# Altium PCB PCB2.PcbDoc (part 1 of 2)
Units mm, origin at the board's own origin, x right, y up, seen from the top; angles counter-clockwise.
Board outline 97.92 x 101.35 mm, 2 copper layers (Top Layer, Bottom Layer); 189 components, 25 nets, 488 pads, 0 vias.
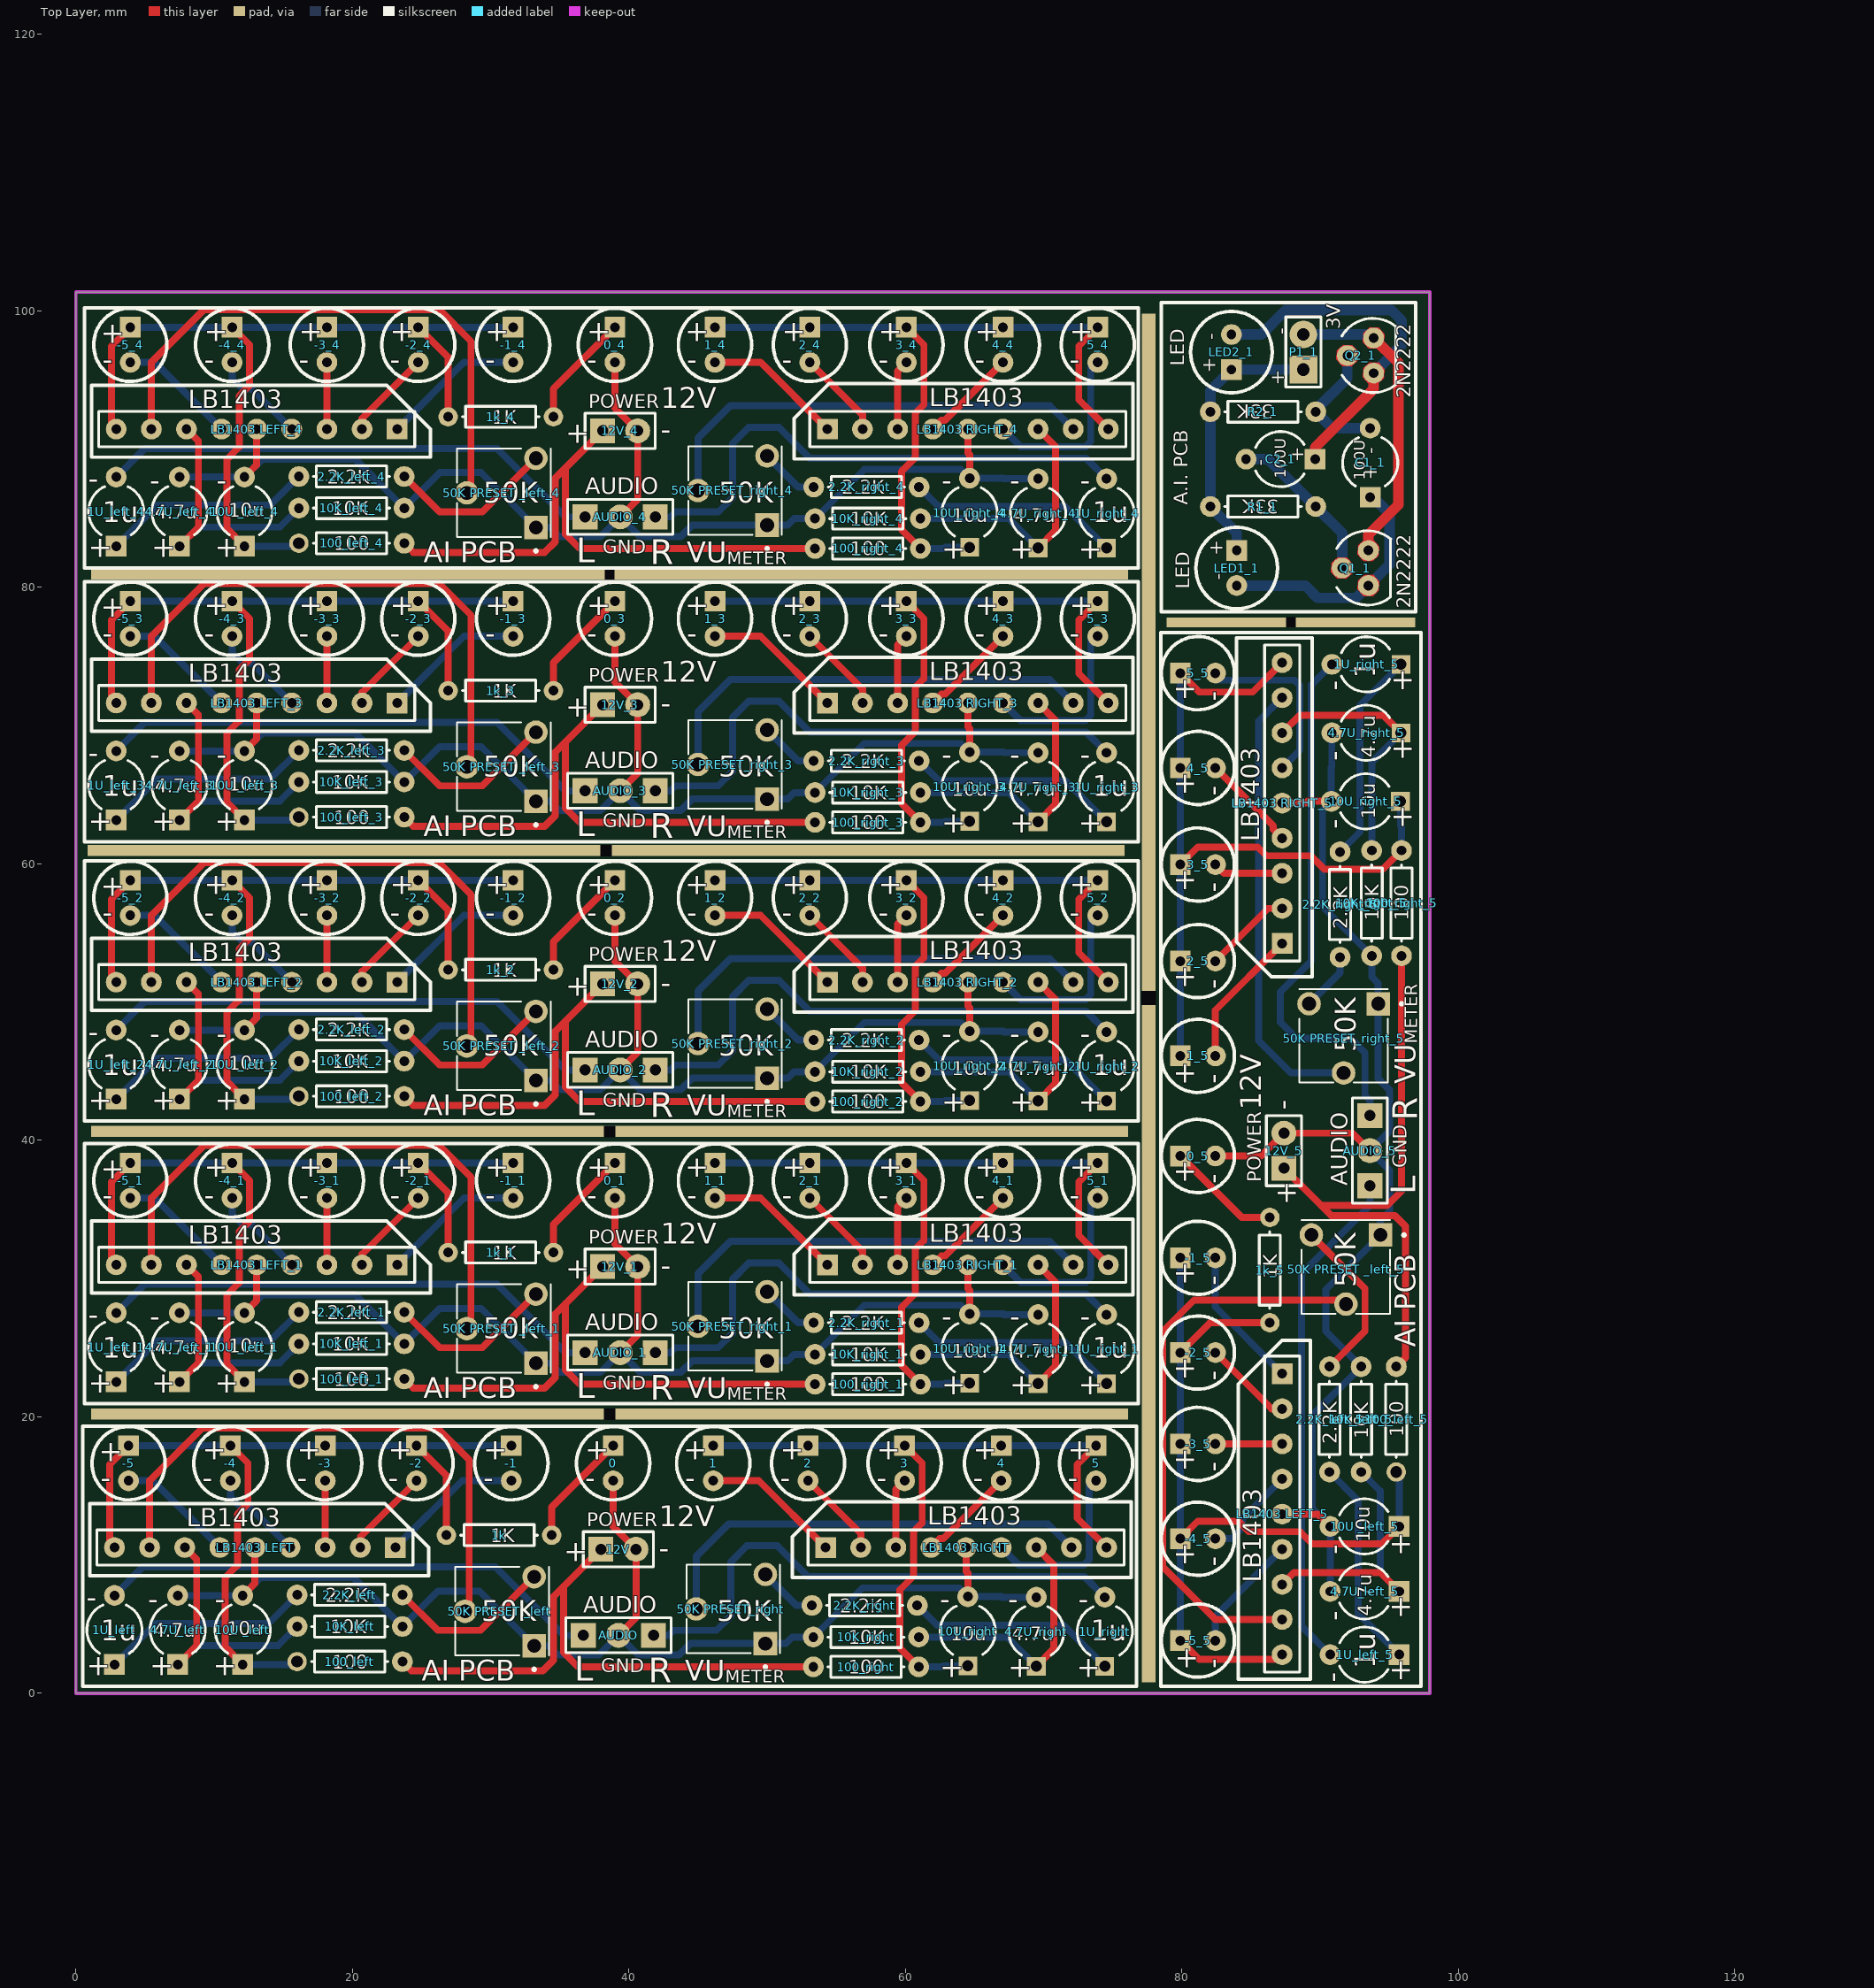
[diagram p0: Top Layer view]
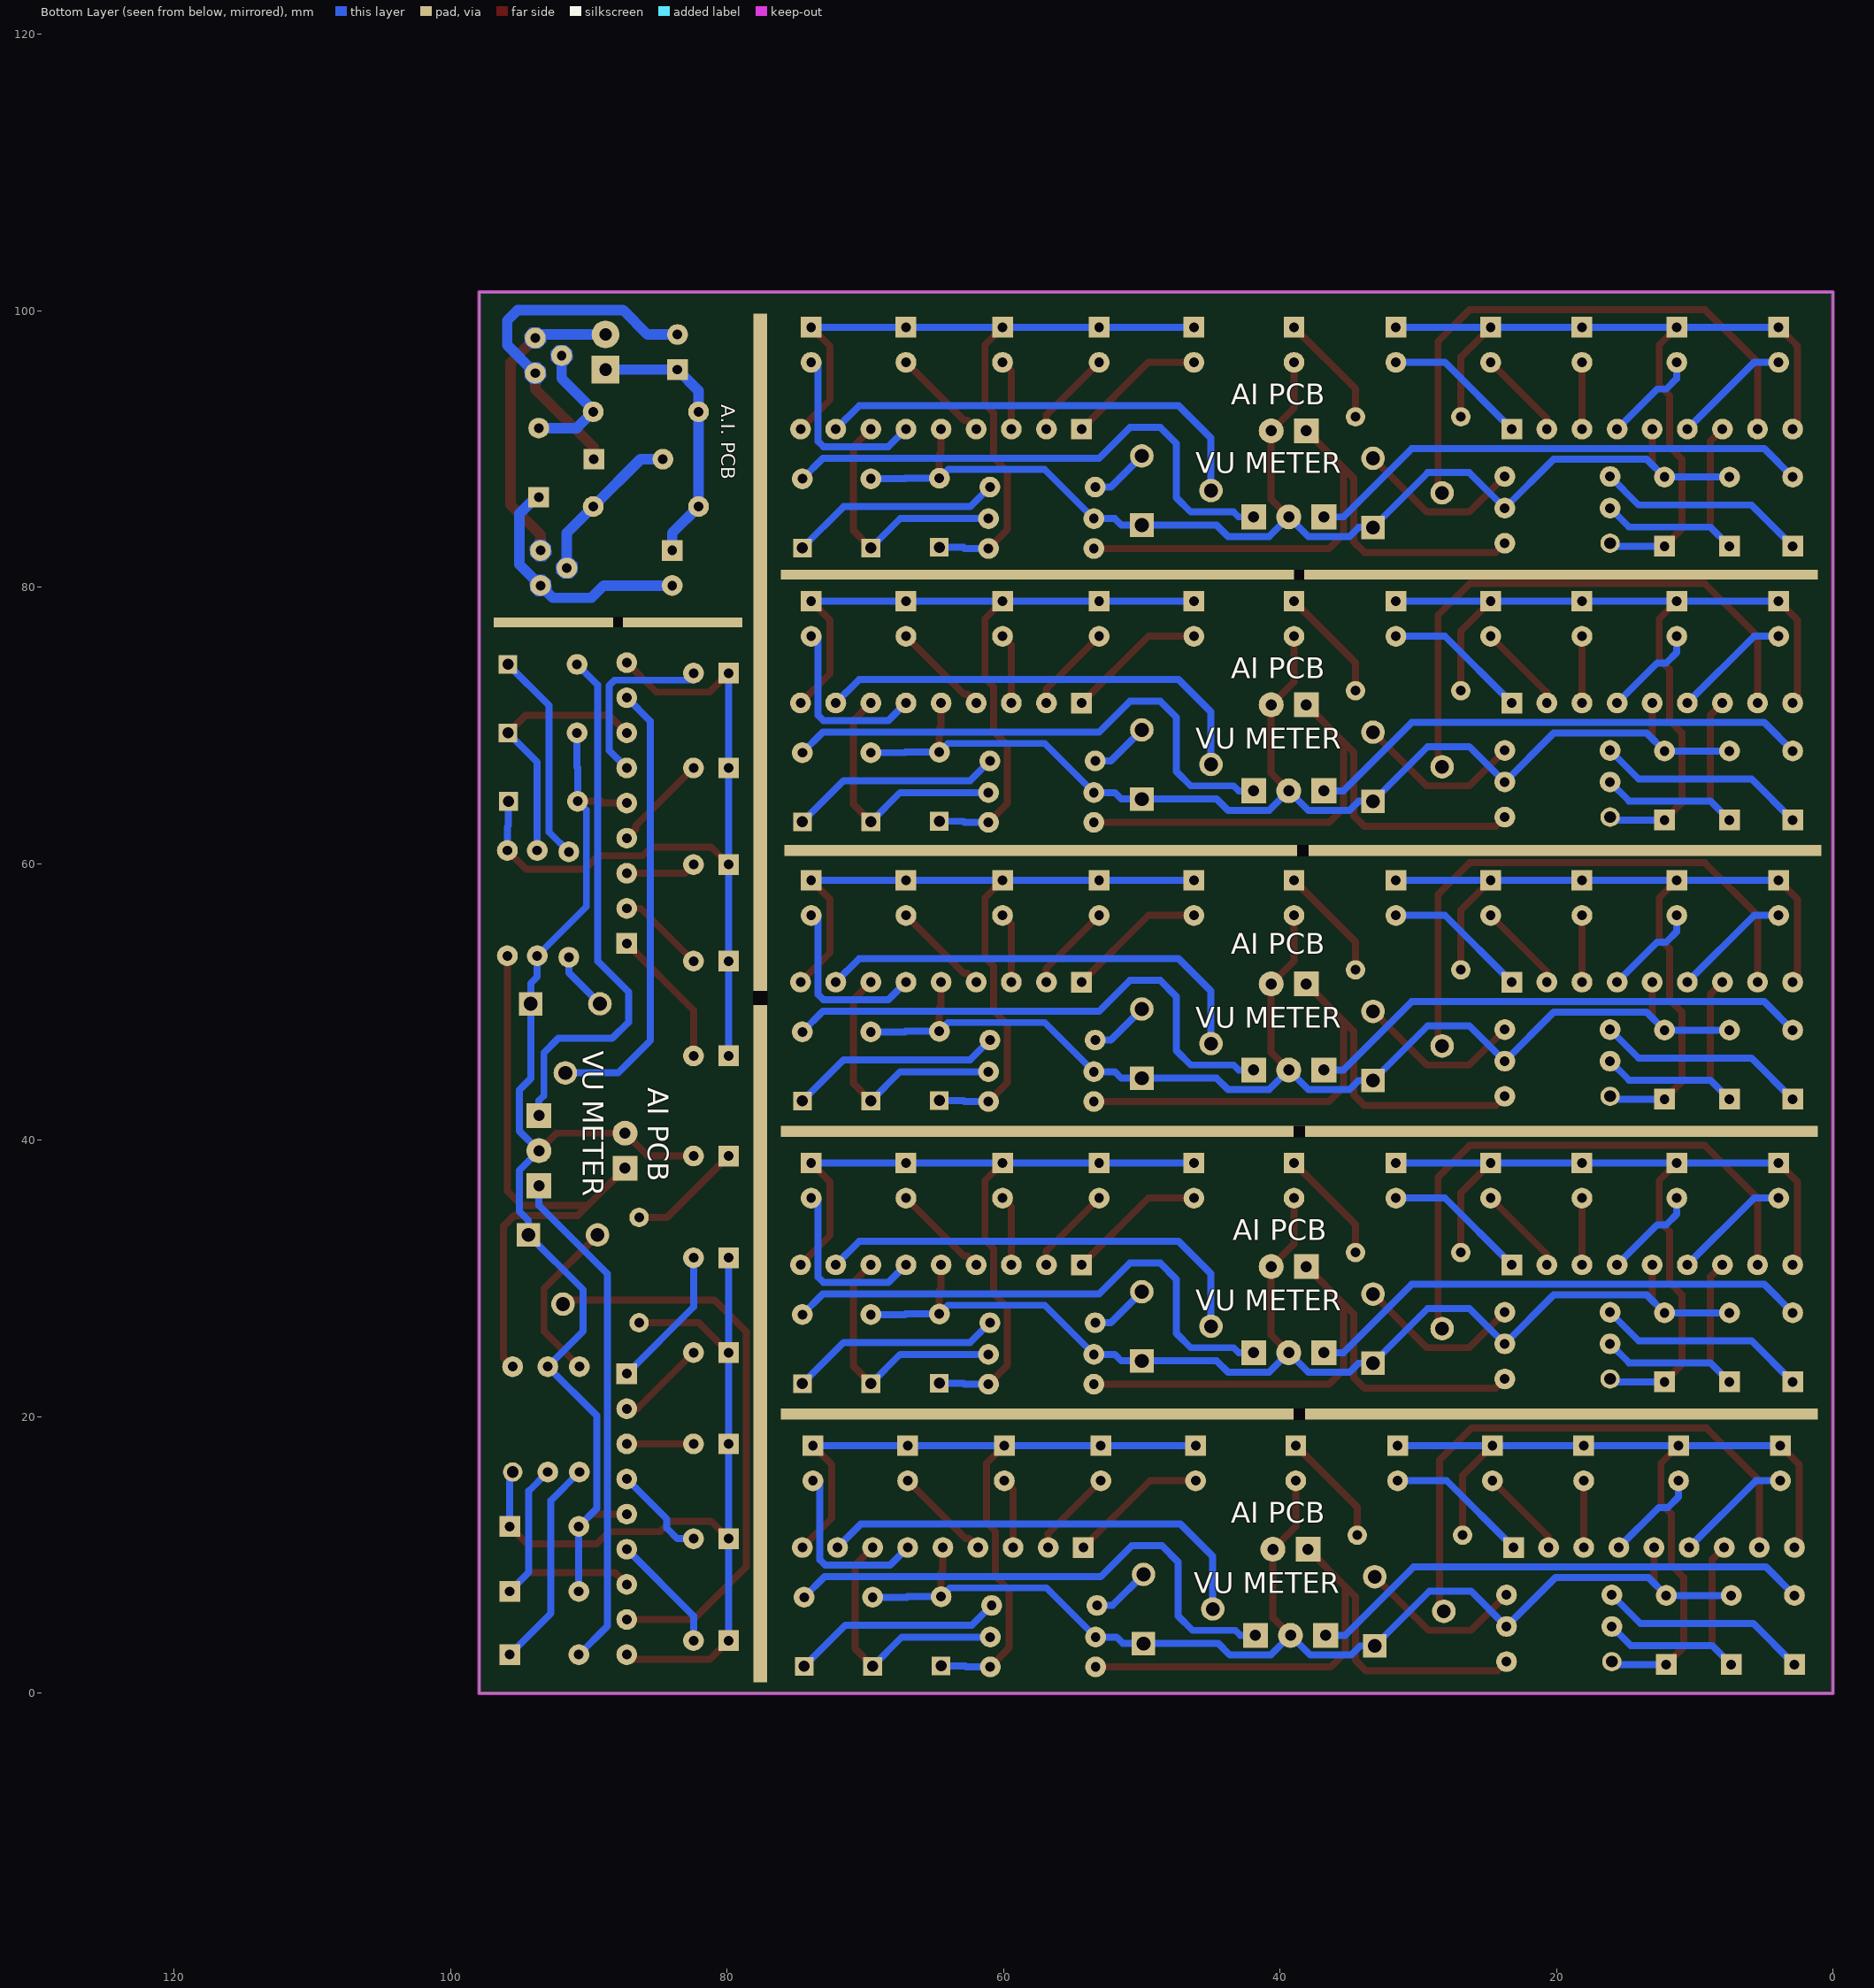
[diagram p1: Bottom Layer view, seen from below]

## Layer stack, top to bottom
Top Solder: solder mask 0.0102, Solder Resist, Dk 3.5
Top Layer: signal copper 0.0356
Dielectric 1: dielectric 0.32, FR-4, Dk 4.8
Bottom Layer: signal copper 0.0356
Bottom Solder: solder mask 0.0102, Solder Resist, Dk 3.5

## Board outline
0,0 0,101.346 97.917,101.346 97.917,0

## Design rules (kind name [scope] priority, off if disabled: settings)
Clearance [All] p1: gap=0.254 ignorepadtopadclearanceinfootprint=FALSE except(0: Arc-Hole Track-Hole SMDPad-Hole THPad-Hole Via-Hole Fill-Hole Poly-Hole Region-Hole Text-Hole)
PolygonConnect [All] p1: connectstyle=Relief reliefconductorwidth=0.254 reliefentries=4 polygonreliefangle="90 Angle" airgapwidth=0.254
RoutingVias [All] p1: holewidth=0.711 width=1.27 viastyle="Through Hole" minholewidth=0.711 minwidth=1.27 maxholewidth=0.711 maxwidth=1.27
SolderMaskExpansion [All] p1: expansion=0.102
Width [All] p1: maxlimit=0.762 minlimit=0.254 preferedwidth=0.508
30 further rules are at their usual default settings.

## Classes and differential pairs
component class Sheet2: 0 1 1k 1U_left 1U_right 2 2.2K_left 2.2K_right 3 4 4.7U_left 4.7U_right 5 10K_left 10K_right "10U _left" 10U_right 12V "50K PRESET _left" "50K PRESET_right" 100_left 100_right -1 -2 -3 -4 -5 AUDIO "LB1403 LEFT" "LB1403 RIGHT"

## Components (designator, comment, footprint, x,y, rotation, side; value= is the part's Value field where it differs from the comment)
0 "L-53GD" L-53GD 38.862,16.637 r270 top
0_1 "L-53GD" L-53GD 38.989,37.084 r270 top (schematic designator 0)
0_2 "L-53GD" L-53GD 38.989,57.531 r270 top (schematic designator 0)
0_3 "L-53GD" L-53GD 38.989,77.724 r270 top (schematic designator 0)
0_4 "L-53GD" L-53GD 38.989,97.536 r270 top (schematic designator 0)
0_5 "L-53GD" L-53GD 81.153,38.862 r0 top (schematic designator 0)
1 "L-53GD" L-53GD 46.101,16.637 r270 top
1_1 "L-53GD" L-53GD 46.228,37.084 r270 top (schematic designator 1)
1_2 "L-53GD" L-53GD 46.228,57.531 r270 top (schematic designator 1)
1_3 "L-53GD" L-53GD 46.228,77.724 r270 top (schematic designator 1)
1_4 "L-53GD" L-53GD 46.228,97.536 r270 top (schematic designator 1)
1_5 "L-53GD" L-53GD 81.153,46.101 r0 top (schematic designator 1)
1k "Res1" AXIAL-0.3#1 30.607,11.43 r0 top value=1K
1k_1 "Res1" AXIAL-0.3#1 30.734,31.877 r0 top value=1K (schematic designator 1k)
1k_2 "Res1" AXIAL-0.3#1 30.734,52.324 r0 top value=1K (schematic designator 1k)
1k_3 "Res1" AXIAL-0.3#1 30.734,72.517 r0 top value=1K (schematic designator 1k)
1k_4 "Res1" AXIAL-0.3#1 30.734,92.329 r0 top value=1K (schematic designator 1k)
1k_5 "Res1" AXIAL-0.3#1 86.36,30.607 r90 top value=1K (schematic designator 1k)
1U_left "Cap2" CAPR5-4X5#1 2.794,4.572 r90 top value=100pF
1U_left_1 "Cap2" CAPR5-4X5#1 2.921,25.019 r90 top value=100pF (schematic designator 1U_left)
1U_left_2 "Cap2" CAPR5-4X5#1 2.921,45.466 r90 top value=100pF (schematic designator 1U_left)
1U_left_3 "Cap2" CAPR5-4X5#1 2.921,65.659 r90 top value=100pF (schematic designator 1U_left)
1U_left_4 "Cap2" CAPR5-4X5#1 2.921,85.471 r90 top value=100pF (schematic designator 1U_left)
1U_left_5 "Cap2" CAPR5-4X5#1 93.218,2.794 r180 top value=100pF (schematic designator 1U_left)
1U_right "Cap2" CAPR5-4X5#2 74.422,4.445 r90 top value=100pF
1U_right_1 "Cap2" CAPR5-4X5#2 74.549,24.892 r90 top value=100pF (schematic designator 1U_right)
1U_right_2 "Cap2" CAPR5-4X5#2 74.549,45.339 r90 top value=100pF (schematic designator 1U_right)
1U_right_3 "Cap2" CAPR5-4X5#2 74.549,65.532 r90 top value=100pF (schematic designator 1U_right)
1U_right_4 "Cap2" CAPR5-4X5#2 74.549,85.344 r90 top value=100pF (schematic designator 1U_right)
1U_right_5 "Cap2" CAPR5-4X5#2 93.345,74.422 r180 top value=100pF (schematic designator 1U_right)
2 "L-53GD" L-53GD 52.959,16.637 r270 top
2.2K_left "Res1" AXIAL-0.3#2 19.812,7.112 r0 top value=1K
2.2K_left_1 "Res1" AXIAL-0.3#2 19.939,27.559 r0 top value=1K (schematic designator 2.2K_left)
2.2K_left_2 "Res1" AXIAL-0.3#2 19.939,48.006 r0 top value=1K (schematic designator 2.2K_left)
2.2K_left_3 "Res1" AXIAL-0.3#2 19.939,68.199 r0 top value=1K (schematic designator 2.2K_left)
2.2K_left_4 "Res1" AXIAL-0.3#2 19.939,88.011 r0 top value=1K (schematic designator 2.2K_left)
2.2K_left_5 "Res1" AXIAL-0.3#2 90.678,19.812 r90 top value=1K (schematic designator 2.2K_left)
2.2K_right "Res1" AXIAL-0.3#2 57.048,6.35 r180 top value=1K
2.2K_right_1 "Res1" AXIAL-0.3#2 57.175,26.797 r180 top value=1K (schematic designator 2.2K_right)
2.2K_right_2 "Res1" AXIAL-0.3#2 57.175,47.244 r180 top value=1K (schematic designator 2.2K_right)
2.2K_right_3 "Res1" AXIAL-0.3#2 57.175,67.437 r180 top value=1K (schematic designator 2.2K_right)
2.2K_right_4 "Res1" AXIAL-0.3#2 57.175,87.249 r180 top value=1K (schematic designator 2.2K_right)
2.2K_right_5 "Res1" AXIAL-0.3#2 91.44,57.048 r270 top value=1K (schematic designator 2.2K_right)
2_1 "L-53GD" L-53GD 53.086,37.084 r270 top (schematic designator 2)
2_2 "L-53GD" L-53GD 53.086,57.531 r270 top (schematic designator 2)
2_3 "L-53GD" L-53GD 53.086,77.724 r270 top (schematic designator 2)
2_4 "L-53GD" L-53GD 53.086,97.536 r270 top (schematic designator 2)
2_5 "L-53GD" L-53GD 81.153,52.959 r0 top (schematic designator 2)
3 "L-53GD" L-53GD 59.944,16.637 r270 top
3_1 "L-53GD" L-53GD 60.071,37.084 r270 top (schematic designator 3)
3_2 "L-53GD" L-53GD 60.071,57.531 r270 top (schematic designator 3)
3_3 "L-53GD" L-53GD 60.071,77.724 r270 top (schematic designator 3)
3_4 "L-53GD" L-53GD 60.071,97.536 r270 top (schematic designator 3)
3_5 "L-53GD" L-53GD 81.153,59.944 r0 top (schematic designator 3)
4 "L-53GD" L-53GD 66.929,16.637 r270 top
4.7U_left "Cap2" CAPR5-4X5#1 7.366,4.572 r90 top value=100pF
4.7U_left_1 "Cap2" CAPR5-4X5#1 7.493,25.019 r90 top value=100pF (schematic designator 4.7U_left)
4.7U_left_2 "Cap2" CAPR5-4X5#1 7.493,45.466 r90 top value=100pF (schematic designator 4.7U_left)
4.7U_left_3 "Cap2" CAPR5-4X5#1 7.493,65.659 r90 top value=100pF (schematic designator 4.7U_left)
4.7U_left_4 "Cap2" CAPR5-4X5#1 7.493,85.471 r90 top value=100pF (schematic designator 4.7U_left)
4.7U_left_5 "Cap2" CAPR5-4X5#1 93.218,7.366 r180 top value=100pF (schematic designator 4.7U_left)
4.7U_right "Cap2" CAPR5-4X5#2 69.469,4.445 r90 top value=100pF
4.7U_right_1 "Cap2" CAPR5-4X5#2 69.596,24.892 r90 top value=100pF (schematic designator 4.7U_right)
4.7U_right_2 "Cap2" CAPR5-4X5#2 69.596,45.339 r90 top value=100pF (schematic designator 4.7U_right)
4.7U_right_3 "Cap2" CAPR5-4X5#2 69.596,65.532 r90 top value=100pF (schematic designator 4.7U_right)
4.7U_right_4 "Cap2" CAPR5-4X5#2 69.596,85.344 r90 top value=100pF (schematic designator 4.7U_right)
4.7U_right_5 "Cap2" CAPR5-4X5#2 93.345,69.469 r180 top value=100pF (schematic designator 4.7U_right)
4_1 "L-53GD" L-53GD 67.056,37.084 r270 top (schematic designator 4)
4_2 "L-53GD" L-53GD 67.056,57.531 r270 top (schematic designator 4)
4_3 "L-53GD" L-53GD 67.056,77.724 r270 top (schematic designator 4)
4_4 "L-53GD" L-53GD 67.056,97.536 r270 top (schematic designator 4)
4_5 "L-53GD" L-53GD 81.153,66.929 r0 top (schematic designator 4)
5 "L-53GD" L-53GD 73.787,16.637 r270 top
5_1 "L-53GD" L-53GD 73.914,37.084 r270 top (schematic designator 5)
5_2 "L-53GD" L-53GD 73.914,57.531 r270 top (schematic designator 5)
5_3 "L-53GD" L-53GD 73.914,77.724 r270 top (schematic designator 5)
5_4 "L-53GD" L-53GD 73.914,97.536 r270 top (schematic designator 5)
5_5 "L-53GD" L-53GD 81.153,73.787 r0 top (schematic designator 5)
10K_left "Res1" AXIAL-0.3#2 19.812,4.826 r180 top value=1K
10K_left_1 "Res1" AXIAL-0.3#2 19.939,25.273 r180 top value=1K (schematic designator 10K_left)
10K_left_2 "Res1" AXIAL-0.3#2 19.939,45.72 r180 top value=1K (schematic designator 10K_left)
10K_left_3 "Res1" AXIAL-0.3#2 19.939,65.913 r180 top value=1K (schematic designator 10K_left)
10K_left_4 "Res1" AXIAL-0.3#2 19.939,85.725 r180 top value=1K (schematic designator 10K_left)
10K_left_5 "Res1" AXIAL-0.3#2 92.964,19.812 r270 top value=1K (schematic designator 10K_left)
10K_right "Res1" AXIAL-0.3#2 57.15,4.064 r0 top value=1K
10K_right_1 "Res1" AXIAL-0.3#2 57.277,24.511 r0 top value=1K (schematic designator 10K_right)
10K_right_2 "Res1" AXIAL-0.3#2 57.277,44.958 r0 top value=1K (schematic designator 10K_right)
10K_right_3 "Res1" AXIAL-0.3#2 57.277,65.151 r0 top value=1K (schematic designator 10K_right)
10K_right_4 "Res1" AXIAL-0.3#2 57.277,84.963 r0 top value=1K (schematic designator 10K_right)
10K_right_5 "Res1" AXIAL-0.3#2 93.726,57.15 r90 top value=1K (schematic designator 10K_right)
"10U _left" "10u" CAPR5-4X5#1 12.065,4.572 r90 top value=100pF
"10U _left_1" "10u" CAPR5-4X5#1 12.192,25.019 r90 top value=100pF (schematic designator "10U _left")
"10U _left_2" "10u" CAPR5-4X5#1 12.192,45.466 r90 top value=100pF (schematic designator "10U _left")
"10U _left_3" "10u" CAPR5-4X5#1 12.192,65.659 r90 top value=100pF (schematic designator "10U _left")
"10U _left_4" "10u" CAPR5-4X5#1 12.192,85.471 r90 top value=100pF (schematic designator "10U _left")
"10U _left_5" "10u" CAPR5-4X5#1 93.218,12.065 r180 top value=100pF (schematic designator "10U _left")
10U_right "10u" CAPR5-4X5#2 64.516,4.485 r90 top value=100pF
10U_right_1 "10u" CAPR5-4X5#2 64.643,24.932 r90 top value=100pF (schematic designator 10U_right)
10U_right_2 "10u" CAPR5-4X5#2 64.643,45.379 r90 top value=100pF (schematic designator 10U_right)
10U_right_3 "10u" CAPR5-4X5#2 64.643,65.572 r90 top value=100pF (schematic designator 10U_right)
10U_right_4 "10u" CAPR5-4X5#2 64.643,85.384 r90 top value=100pF (schematic designator 10U_right)
10U_right_5 "10u" CAPR5-4X5#2 93.305,64.516 r180 top value=100pF (schematic designator 10U_right)
12V "Header 2" HDR1X2#1 37.973,10.414 r0 top (schematic designator power1)
12V_1 "Header 2" HDR1X2#1 38.1,30.861 r0 top (schematic designator power1)
12V_2 "Header 2" HDR1X2#1 38.1,51.308 r0 top (schematic designator power1)
12V_3 "Header 2" HDR1X2#1 38.1,71.501 r0 top (schematic designator power1)
12V_4 "Header 2" HDR1X2#1 38.1,91.313 r0 top (schematic designator power1)
12V_5 "Header 2" HDR1X2#1 87.376,37.973 r90 top (schematic designator power1)
"50K PRESET _left" "EVN-D8AA03B14" *TRIM_EVN-D8AA03B14 30.647,5.929 r90 top
"50K PRESET _left_1" "EVN-D8AA03B14" *TRIM_EVN-D8AA03B14 30.774,26.376 r90 top (schematic designator "50K PRESET _left")
"50K PRESET _left_2" "EVN-D8AA03B14" *TRIM_EVN-D8AA03B14 30.774,46.823 r90 top (schematic designator "50K PRESET _left")
"50K PRESET _left_3" "EVN-D8AA03B14" *TRIM_EVN-D8AA03B14 30.774,67.016 r90 top (schematic designator "50K PRESET _left")
"50K PRESET _left_4" "EVN-D8AA03B14" *TRIM_EVN-D8AA03B14 30.774,86.828 r90 top (schematic designator "50K PRESET _left")
"50K PRESET _left_5" "EVN-D8AA03B14" *TRIM_EVN-D8AA03B14 91.861,30.647 r180 top (schematic designator "50K PRESET _left")
"50K PRESET_right" "EVN-D8AA03B14" *TRIM_EVN-D8AA03B14 47.371,6.096 r90 top
"50K PRESET_right_1" "EVN-D8AA03B14" *TRIM_EVN-D8AA03B14 47.498,26.543 r90 top (schematic designator "50K PRESET_right")
"50K PRESET_right_2" "EVN-D8AA03B14" *TRIM_EVN-D8AA03B14 47.498,46.99 r90 top (schematic designator "50K PRESET_right")
"50K PRESET_right_3" "EVN-D8AA03B14" *TRIM_EVN-D8AA03B14 47.498,67.183 r90 top (schematic designator "50K PRESET_right")
"50K PRESET_right_4" "EVN-D8AA03B14" *TRIM_EVN-D8AA03B14 47.498,86.995 r90 top (schematic designator "50K PRESET_right")
"50K PRESET_right_5" "EVN-D8AA03B14" *TRIM_EVN-D8AA03B14 91.694,47.371 r180 top (schematic designator "50K PRESET_right")
100_left "Res1" AXIAL-0.3#3 19.812,2.286 r0 top value=1K
100_left_1 "Res1" AXIAL-0.3#3 19.939,22.733 r0 top value=1K (schematic designator 100_left)
100_left_2 "Res1" AXIAL-0.3#3 19.939,43.18 r0 top value=1K (schematic designator 100_left)
100_left_3 "Res1" AXIAL-0.3#3 19.939,63.373 r0 top value=1K (schematic designator 100_left)
100_left_4 "Res1" AXIAL-0.3#3 19.939,83.185 r0 top value=1K (schematic designator 100_left)
100_left_5 "Res1" AXIAL-0.3#3 95.504,19.812 r90 top value=1K (schematic designator 100_left)
100_right "Res1" AXIAL-0.3#2 57.15,1.905 r180 top value=1K
100_right_1 "Res1" AXIAL-0.3#2 57.277,22.352 r180 top value=1K (schematic designator 100_right)
100_right_2 "Res1" AXIAL-0.3#2 57.277,42.799 r180 top value=1K (schematic designator 100_right)
100_right_3 "Res1" AXIAL-0.3#2 57.277,62.992 r180 top value=1K (schematic designator 100_right)
100_right_4 "Res1" AXIAL-0.3#2 57.277,82.804 r180 top value=1K (schematic designator 100_right)
100_right_5 "Res1" AXIAL-0.3#2 95.885,57.15 r270 top value=1K (schematic designator 100_right)
-1 "L-53GD" L-53GD 31.496,16.637 r270 top
-1_1 "L-53GD" L-53GD 31.623,37.084 r270 top (schematic designator -1)
-1_2 "L-53GD" L-53GD 31.623,57.531 r270 top (schematic designator -1)
-1_3 "L-53GD" L-53GD 31.623,77.724 r270 top (schematic designator -1)
-1_4 "L-53GD" L-53GD 31.623,97.536 r270 top (schematic designator -1)
-1_5 "L-53GD" L-53GD 81.153,31.496 r0 top (schematic designator -1)
-2 "L-53GD" L-53GD 24.638,16.637 r270 top
-2_1 "L-53GD" L-53GD 24.765,37.084 r270 top (schematic designator -2)
-2_2 "L-53GD" L-53GD 24.765,57.531 r270 top (schematic designator -2)
-2_3 "L-53GD" L-53GD 24.765,77.724 r270 top (schematic designator -2)
-2_4 "L-53GD" L-53GD 24.765,97.536 r270 top (schematic designator -2)
-2_5 "L-53GD" L-53GD 81.153,24.638 r0 top (schematic designator -2)
-3 "L-53GD" L-53GD 18.034,16.637 r270 top
-3_1 "L-53GD" L-53GD 18.161,37.084 r270 top (schematic designator -3)
-3_2 "L-53GD" L-53GD 18.161,57.531 r270 top (schematic designator -3)
-3_3 "L-53GD" L-53GD 18.161,77.724 r270 top (schematic designator -3)
-3_4 "L-53GD" L-53GD 18.161,97.536 r270 top (schematic designator -3)
-3_5 "L-53GD" L-53GD 81.153,18.034 r0 top (schematic designator -3)
-4 "L-53GD" L-53GD 11.176,16.637 r270 top
-4_1 "L-53GD" L-53GD 11.303,37.084 r270 top (schematic designator -4)
-4_2 "L-53GD" L-53GD 11.303,57.531 r270 top (schematic designator -4)
-4_3 "L-53GD" L-53GD 11.303,77.724 r270 top (schematic designator -4)
-4_4 "L-53GD" L-53GD 11.303,97.536 r270 top (schematic designator -4)
-4_5 "L-53GD" L-53GD 81.153,11.176 r0 top (schematic designator -4)
-5 "L-53GD" L-53GD 3.81,16.637 r270 top
-5_1 "L-53GD" L-53GD 3.937,37.084 r270 top (schematic designator -5)
-5_2 "L-53GD" L-53GD 3.937,57.531 r270 top (schematic designator -5)
-5_3 "L-53GD" L-53GD 3.937,77.724 r270 top (schematic designator -5)
-5_4 "L-53GD" L-53GD 3.937,97.536 r270 top (schematic designator -5)
-5_5 "L-53GD" L-53GD 81.153,3.81 r0 top (schematic designator -5)
AUDIO "Header 3" HDR1X3 36.703,4.191 r0 top
AUDIO_1 "Header 3" HDR1X3 36.83,24.638 r0 top (schematic designator AUDIO)
AUDIO_2 "Header 3" HDR1X3 36.83,45.085 r0 top (schematic designator AUDIO)
AUDIO_3 "Header 3" HDR1X3 36.83,65.278 r0 top (schematic designator AUDIO)
AUDIO_4 "Header 3" HDR1X3 36.83,85.09 r0 top (schematic designator AUDIO)
AUDIO_5 "Header 3" HDR1X3 93.599,36.703 r90 top (schematic designator AUDIO)
C1_1 "Cap1" CAPR5-4X5#1 93.615,89.011 r90 top value=100uF (schematic designator C1)
C2_1 "Cap2" CAPR5-4X5#1 87.138,89.265 r180 top value=100uF (schematic designator C2)
"LB1403 LEFT" "Header 9" HDR1X9 23.114,10.541 r180 top
"LB1403 LEFT_1" "Header 9" HDR1X9 23.241,30.988 r180 top (schematic designator "LB1403 LEFT")
"LB1403 LEFT_2" "Header 9" HDR1X9 23.241,51.435 r180 top (schematic designator "LB1403 LEFT")
"LB1403 LEFT_3" "Header 9" HDR1X9 23.241,71.628 r180 top (schematic designator "LB1403 LEFT")
"LB1403 LEFT_4" "Header 9" HDR1X9 23.241,91.44 r180 top (schematic designator "LB1403 LEFT")
"LB1403 LEFT_5" "Header 9" HDR1X9 87.249,23.114 r270 top (schematic designator "LB1403 LEFT")
"LB1403 RIGHT" "Header 9" HDR1X9 54.229,10.541 r0 top
"LB1403 RIGHT_1" "Header 9" HDR1X9 54.356,30.988 r0 top (schematic designator "LB1403 RIGHT")
"LB1403 RIGHT_2" "Header 9" HDR1X9 54.356,51.435 r0 top (schematic designator "LB1403 RIGHT")
"LB1403 RIGHT_3" "Header 9" HDR1X9 54.356,71.628 r0 top (schematic designator "LB1403 RIGHT")
"LB1403 RIGHT_4" "Header 9" HDR1X9 54.356,91.44 r0 top (schematic designator "LB1403 RIGHT")
"LB1403 RIGHT_5" "Header 9" HDR1X9 87.249,54.229 r90 top (schematic designator "LB1403 RIGHT")
LED1_1 "L-53GD" L-53GD 83.963,81.391 r270 top (schematic designator LED1)
LED2_1 "L-53GD" L-53GD 83.582,97.012 r90 top (schematic designator LED2)
P1_1 "Header 2" HDR1X2#2 88.789,95.742 r90 top (schematic designator P1)
Q1_1 "P2N2222A" *TO92 93.488,81.391 r90 top (schematic designator Q1)
Q2_1 "P2N2222A" *TO92 93.869,96.758 r90 top (schematic designator Q2)
R1_1 "Res1" AXIAL-0.3#2 85.868,85.836 r180 top value=33K (schematic designator R1)
R2_1 "Res1" AXIAL-0.3#2 85.868,92.694 r180 top value=33K (schematic designator R2)

## Footprints (in the part's own frame and the unit in brackets; to place one, negate y for a bottom-side part, rotate by r counter-clockwise, add the part's x,y. Pads: shape width x height; smd on the part's side, far side on the other; paste and mask are expansions set on the pad)
*TO92 [mm]
  round 1.5 hole 0.7: 1(1.27,0) 2(0,1.905) 3(-1.27,0)
  Top Layer region: -0.482,0.287 -0.916,0.76 -1.557,0.788 -2.03,0.354 -2.058,-0.287 -1.624,-0.76 -0.983,-0.788 -0.51,-0.354
  Top Layer region: 0.788,2.192 0.354,2.665 -0.287,2.693 -0.76,2.259 -0.788,1.618 -0.354,1.145 0.287,1.117 0.76,1.551
  Top Layer region: 2.058,0.287 1.624,0.76 0.983,0.788 0.51,0.354 0.482,-0.287 0.916,-0.76 1.557,-0.788 2.03,-0.354
  Bottom Layer region: -0.482,0.287 -0.916,0.76 -1.557,0.788 -2.03,0.354 -2.058,-0.287 -1.624,-0.76 -0.983,-0.788 -0.51,-0.354
  Bottom Layer region: 0.788,2.192 0.354,2.665 -0.287,2.693 -0.76,2.259 -0.788,1.618 -0.354,1.145 0.287,1.117 0.76,1.551
  Bottom Layer region: 2.058,0.287 1.624,0.76 0.983,0.788 0.51,0.354 0.482,-0.287 0.916,-0.76 1.557,-0.788 2.03,-0.354
  Multi-Layer region: -0.482,0.287 -0.916,0.76 -1.557,0.788 -2.03,0.354 -2.058,-0.287 -1.624,-0.76 -0.983,-0.788 -0.51,-0.354
  Multi-Layer region: 0.788,2.192 0.354,2.665 -0.287,2.693 -0.76,2.259 -0.788,1.618 -0.354,1.145 0.287,1.117 0.76,1.551
  Multi-Layer region: 2.058,0.287 1.624,0.76 0.983,0.788 0.51,0.354 0.482,-0.287 0.916,-0.76 1.557,-0.788 2.03,-0.354
  silkscreen extent -2.68,-1.61 2.7,2.3
*TRIM_EVN-D8AA03B14 [mm]
  rect 1.7x1.7 hole 1: 1(-2.5,-2.5)
  round 1.7 hole 1: 2(0,2.5) 3(2.5,-2.5)
  silkscreen extent -4.3,-3.57 3.2,3.2
AXIAL-0.3#1 [mm] "Axial Device, Thru-Hole; 2 Leads; 0.3 in Pin Spacing"
  round 1.4 hole 0.7: 1(-3.81,0) 2(3.81,0)
  silkscreen extent -2.77,-0.76 2.77,0.76
AXIAL-0.3#2 [mm] "Axial Device, Thru-Hole; 2 Leads; 0.3 in Pin Spacing"
  round 1.5 hole 0.7: 1(-3.81,0) 2(3.81,0)
  silkscreen extent -2.77,-0.76 2.77,0.76
AXIAL-0.3#3 [mm] "Axial Device, Thru-Hole; 2 Leads; 0.3 in Pin Spacing"
  round 1.4 hole 0.85: 1(-3.81,0)
  round 1.5 hole 0.7: 2(3.81,0)
  silkscreen extent -2.77,-0.76 2.77,0.76
CAPR5-4X5#1 [mm] "Capacitor; 2 Leads"
  rect 1.5x1.5 hole 0.7: 1(-2.5,0)
  round 1.5 hole 0.7: 2(2.5,0)
  silkscreen extent -1.69,-2 1.82,2
CAPR5-4X5#2 [mm] "Capacitor; 2 Leads"
  rect 1.35x1.35 hole 0.8: 1(-2.5,0)
  round 1.5 hole 0.7: 2(2.5,0)
  silkscreen extent -1.69,-2 1.82,2
HDR1X2#1 [mm] "Connector; Header; 2 Position"
  rect 1.8x1.8 hole 0.8: 1(0,0)
  round 1.8 hole 0.8: 2(2.54,0)
  silkscreen extent -1.27,-1.27 3.81,1.27
HDR1X2#2 [mm] "Connector; Header; 2 Position"
  rect 2x2 hole 0.9: 1(0,0)
  round 2 hole 0.9: 2(2.54,0)
  silkscreen extent -1.27,-1.27 3.81,1.27
HDR1X3 [mm] "Connector; Header; 3 Position"
  rect 1.8x1.8 hole 0.8: 1(0,0) 3(5.08,0)
  round 1.8 hole 0.8: 2(2.54,0)
  silkscreen extent -1.27,-1.27 6.35,1.27
HDR1X9 [mm] "Connector; Header; 9 Position"
  rect 1.5x1.5 hole 0.7: 1(0,0)
  round 1.5 hole 0.7: 2(2.54,0) 3(5.08,0) 4(7.62,0) 5(10.16,0) 6(12.7,0) 7(15.24,0) 8(17.78,0) 9(20.32,0)
  silkscreen extent -1.27,-1.27 21.59,1.27
L-53GD [mm]
  rect 1.5x1.5 hole 0.7: 1(-1.27,0)
  round 1.5 hole 0.7: 2(1.27,0)
  silkscreen extent -2.65,-2.65 2.65,2.65

## Part data
0 0_1 0_2 0_3 0_4 0_5 1 1_1 1_2 1_3 1_4 1_5 2 2_1 2_2 2_3 2_4 2_5 3 3_1 3_2 3_3 3_4 3_5 4 4_1 4_2 4_3 4_4 4_5 5 5_1 5_2 5_3 5_4 5_5 -1 -1_1 -1_2 -1_3 -1_4 -1_5 -2 -2_1 -2_2 -2_3 -2_4 -2_5 -3 -3_1 -3_2 -3_3 -3_4 -3_5 -4 -4_1 -4_2 -4_3 -4_4 -4_5 -5 -5_1 -5_2 -5_3 -5_4 -5_5 LED1_1 LED2_1: "LED", Manufacturer_Name=Kingbright, Mouser Part Number=N/A, RS Part Number=2286004A, Allied_Number=70424261, Allied Price/Stock=http://www.alliedelec.com/kingbright-l-53gd/70424261/, Datasheet Link=http://docs-emea.rs-online.com/webdocs/151e/0900766b8151e408.pdf, Manufacturer_Part_Number=L-53GD, Mouser Price/Stock=https://www.mouser.com/Search/Refine.aspx?Keyword=N%2FA, RS Price/Stock=http://uk.rs-online.com/web/p/products/2286004A
1k 1k_1 1k_2 1k_3 1k_4 1k_5 2.2K_left 2.2K_left_1 2.2K_left_2 2.2K_left_3 2.2K_left_4 2.2K_left_5 2.2K_right 2.2K_right_1 2.2K_right_2 2.2K_right_3 2.2K_right_4 2.2K_right_5 10K_left 10K_left_1 10K_left_2 10K_left_3 10K_left_4 10K_left_5 10K_right 10K_right_1 10K_right_2 10K_right_3 10K_right_4 10K_right_5 100_left 100_left_1 100_left_2 100_left_3 100_left_4 100_left_5 100_right 100_right_1 100_right_2 100_right_3 100_right_4 100_right_5 R1_1 R2_1: "Resistor", LatestRevisionDate=17-Jul-2002, LatestRevisionNote="Re-released for DXP Platform.", PackageDescription="Axial Device, Thru-Hole; 2 Leads; 0.3 in Pin Spacing", PackageReference=AXIAL-0.3, Published=8-Jun-2000, Publisher="Altium Limited"
1U_left 1U_left_1 1U_left_2 1U_left_3 1U_left_4 1U_left_5 1U_right 1U_right_1 1U_right_2 1U_right_3 1U_right_4 1U_right_5 4.7U_left 4.7U_left_1 4.7U_left_2 4.7U_left_3 4.7U_left_4 4.7U_left_5 4.7U_right 4.7U_right_1 4.7U_right_2 4.7U_right_3 4.7U_right_4 4.7U_right_5 C2_1: "Capacitor", PackageDescription="Capacitor; 2 Leads", PackageReference=CAPR5-4X5, Published=23-Sep-2002, Publisher="Altium Limited"
"10U _left" "10U _left_1" "10U _left_2" "10U _left_3" "10U _left_4" "10U _left_5" 10U_right 10U_right_1 10U_right_2 10U_right_3 10U_right_4 10U_right_5 C1_1: library part Cap2, "Capacitor", PackageDescription="Capacitor; 2 Leads", PackageReference=CAPR5-4X5, Published=23-Sep-2002, Publisher="Altium Limited"
12V 12V_1 12V_2 12V_3 12V_4 12V_5 P1_1: "Header, 2-Pin", LatestRevisionDate=17-Jul-2002, LatestRevisionNote="Re-released for DXP Platform.", Publisher="Altium Limited"
"50K PRESET _left" "50K PRESET _left_1" "50K PRESET _left_2" "50K PRESET _left_3" "50K PRESET _left_4" "50K PRESET _left_5" "50K PRESET_right" "50K PRESET_right_1" "50K PRESET_right_2" "50K PRESET_right_3" "50K PRESET_right_4" "50K PRESET_right_5": "Trimmer; Carbon; Rest 10 Kilohms; PCB; 1 Turn; Pwr-Rtg 0.1 W; Linear; Top Adj; 6 mm SQ", Package="PQFP-44 Panasonic", Availability=Unavailable, MF="Panasonic Electronic", MP=EVN-D8AA03B14, Price=None, SnapEDA_Link=https://www.snapeda.com/parts/EVN-D8AA03B14/Panasonic%20Electronic%20Components/view-part/?ref=snap
AUDIO AUDIO_1 AUDIO_2 AUDIO_3 AUDIO_4 AUDIO_5: "Header, 3-Pin", LatestRevisionDate=17-Jul-2002, LatestRevisionNote="Re-released for DXP Platform.", Publisher="Altium Limited"
"LB1403 LEFT" "LB1403 LEFT_1" "LB1403 LEFT_2" "LB1403 LEFT_3" "LB1403 LEFT_4" "LB1403 LEFT_5" "LB1403 RIGHT" "LB1403 RIGHT_1" "LB1403 RIGHT_2" "LB1403 RIGHT_3" "LB1403 RIGHT_4" "LB1403 RIGHT_5": "Header, 9-Pin", LatestRevisionDate=17-Jul-2002, LatestRevisionNote="Re-released for DXP Platform.", Publisher="Altium Limited"
Q1_1 Q2_1: Package="TO-92 NXP Semiconductors", Availability=Unavailable, MF="ON Semiconductor", MP=P2N2222A, Price=None, SnapEDA_Link=https://www.snapeda.com/parts/P2N2222A/ON%20Semiconductor/view-part/?ref=snap

## Free pads (board coordinates)
  rect 1x99 hole 1 square: 4(77.597,50.292)
  rect 75x0.8 hole 0.8 square: 5(38.354,60.96) 5(38.608,20.193) 5(38.608,40.64)
  rect 75x0.7 hole 0.7 square: 5(38.608,80.899)
  rect 18x0.7 hole 0.7 square: 6(87.884,77.47)

## Nets (pads, with @x,y where several pads share a name; then routed paths per layer and width w, separated by ;. In a path a pad name is that pad's centre, name@x,y a point inside that pad or via, vN(x,y) a via of type N, cw(c..) or ccw(c..) an arc to the next point about the centre after c; other vN are vias at no path point)
Net0_1: 0.1 1k.2 | length 8.3
  Top Layer w0.508: 1k.2@34.417,11.43 34.417,13.462 0.1@38.862,17.907
Net0_2: 0.2 4.7U_left.2 4.7U_right.2 10K_left.1 10K_right.1 10U_right.2 12V.2 "10U _left.2" "50K PRESET _left.1" "50K PRESET_right.1" "LB1403 LEFT.5" "LB1403 RIGHT.5" AUDIO.2 | length 90.4
  Top Layer w0.508: 12.065,7.072 12.954,7.961 12.954,10.541 ; 0.2@38.862,15.367 38.862,12.065 12V.2@40.513,10.414 40.513,5.461 AUDIO.2@39.243,4.191 ; 64.389,10.541 64.389,8.814 64.516,8.687 10U_right.2@64.516,6.985
  Bottom Layer w0.508: 4.7U_left.2@7.366,7.072 12.065,7.072 13.363,8.37 20.078,8.37 10K_left.1@23.622,4.826 26.187,7.391 29.185,7.391 33.147,3.429 34.188,3.429 34.849,2.769 37.821,2.769 AUDIO.2@39.243,4.191 40.665,2.769 43.637,2.769 44.465,3.596 49.871,3.596 51.359,3.596 51.827,4.064 10K_right.1@53.34,4.064 56.896,7.62 63.881,7.62 10U_right.2@64.516,6.985 66.954,6.985 66.994,6.945 4.7U_right.2@69.469,6.945
Net1_1: 1.1 2.1 3.1 4.1 5.1 10U_right.1 100_right.1 "LB1403 RIGHT.9" | length 57.9
  Top Layer w0.508: 3.1@59.944,17.907 61.214,16.637 61.214,12.319 60.579,11.684 60.579,8.458 59.588,7.468 59.588,3.277 100_right.1@60.96,1.905 ; 5.1@73.787,17.907 72.415,16.535 72.415,12.675 74.549,10.541
  Bottom Layer w0.508: 1.1@46.101,17.907 2.1@52.959,17.907 3.1@59.944,17.907 4.1@66.929,17.907 5.1@73.787,17.907 ; 100_right.1@60.96,1.905 62.687,1.905 62.767,1.985 10U_right.1@64.516,1.985
Net1_2: 1.2 "LB1403 RIGHT.1" | length 10.1
  Top Layer w0.508: 1.2@46.101,15.367 49.403,15.367 54.229,10.541
Net1U_left_1: 1U_left.1 2.2K_left.1 | length 15.3
  Bottom Layer w0.508: 1U_left.1@2.794,2.072 5.777,5.055 13.945,5.055 2.2K_left.1@16.002,7.112
Net1U_left_2: 1U_left.2 AUDIO.1 | length 36.8
  Bottom Layer w0.508: 1U_left.2@2.794,7.072 4.854,9.132 30.34,9.132 35.281,4.191 AUDIO.1@36.703,4.191
Net1U_right_1: 1U_right.1 2.2K_right.1 | length 15.4
  Bottom Layer w0.508: 2.2K_right.1@60.858,6.35 62.281,4.928 71.439,4.928 1U_right.1@74.422,1.945
Net1U_right_2: 1U_right.2 AUDIO.3 | length 39.2
  Bottom Layer w0.508: AUDIO.3@41.783,4.191 42.875,4.191 43.231,4.547 46.33,4.547 47.371,5.588 47.371,9.5 48.539,10.668 50.724,10.668 52.959,8.433 72.934,8.433 1U_right.2@74.422,6.945
Net2.2K_left_2: 2.2K_left.2 "50K PRESET _left.3" | length 12.2
  Top Layer w0.508: 2.2K_left.2@23.622,7.112 26.187,4.547 29.265,4.547 33.147,8.429
Net2.2K_right_2: 2.2K_right.2 "50K PRESET_right.3" | length 4.3
  Bottom Layer w0.508: 49.871,8.596 52.117,6.35 2.2K_right.2@53.238,6.35
Net2_2: 2.2 "LB1403 RIGHT.2" | length 6.4
  Top Layer w0.508: 2.2@52.959,15.367 56.769,11.557 56.769,10.541
Net3_2: 3.2 "LB1403 RIGHT.3" | length 5.1
  Top Layer w0.508: 59.309,10.541 59.309,14.732 3.2@59.944,15.367
Net4.7U_left_1: 4.7U_left.1 10K_left.2 "LB1403 LEFT.7" | length 19.2
  Top Layer w0.508: 4.7U_left.1@7.366,2.072 8.738,3.444 8.738,9.677 7.874,10.541
  Bottom Layer w0.508: 4.7U_left.1@7.366,2.072 8.748,3.454 14.63,3.454 10K_left.2@16.002,4.826
Net4.7U_right_1: 4.7U_right.1 10K_right.2 "LB1403 RIGHT.7" | length 19
  Top Layer w0.508: 4.7U_right.1@69.469,1.945 70.739,3.215 70.739,9.271 69.469,10.541
  Bottom Layer w0.508: 10K_right.2@60.96,4.064 67.35,4.064 4.7U_right.1@69.469,1.945
Net4_2: 4.2 "LB1403 RIGHT.4" | length 7.1
  Top Layer w0.508: 61.849,10.541 62.484,11.176 62.738,11.176 4.2@66.929,15.367
Net5_2: 5.2 "LB1403 RIGHT.6" | length 13.3
  Bottom Layer w0.508: 66.929,10.541 68.199,9.271 72.898,9.271 73.279,9.652 73.279,15.367 5.2@73.787,15.367
"Net50K PRESET _left_2": "50K PRESET _left.2" "LB1403 LEFT.8" | length 41.6
  Top Layer w0.508: 5.334,10.541 5.334,15.367 9.144,19.177 26.162,19.177 28.448,16.891 28.448,6.23 28.147,5.929
"Net50K PRESET_right_2": "50K PRESET_right.2" "LB1403 RIGHT.8" | length 32.6
  Bottom Layer w0.508: 44.871,6.096 44.871,9.906 47.208,12.243 70.307,12.243 72.009,10.541
Net100_left_2: 12V.1 100_left.2 100_right.2 | length 44.2
  Top Layer w0.508: 100_left.2@23.622,2.286 24.282,1.626 33.782,1.626 34.544,2.388 34.544,6.985 35.281,7.722 ; 12V.1@37.973,10.414 35.281,7.722 ; 100_right.2@53.34,1.905 36.322,1.905 35.281,2.946 35.281,7.722
Net-1_1: 1k.1 100_left.1 "10U _left.1" "LB1403 LEFT.9" -1.1 -2.1 -3.1 -4.1 -5.1 | length 64.7
  Top Layer w0.508: 2.794,10.541 2.438,10.897 2.438,16.535 -5.1@3.81,17.907 ; -4.1@11.176,17.907 12.446,16.637 12.446,13.716 11.684,12.954 11.684,9.246 10.795,8.357 10.795,3.342 12.065,2.072 ; -2.1@24.638,17.907 26.797,15.748 1k.1@26.797,11.43
  Bottom Layer w0.508: -5.1@3.81,17.907 -4.1@11.176,17.907 -3.1@18.034,17.907 -2.1@24.638,17.907 -1.1@31.496,17.907 ; 12.065,2.072 15.788,2.072 100_left.1@16.002,2.286
Net-1_2: "LB1403 LEFT.1" -1.2 | length 10.4
  Bottom Layer w0.508: 23.114,10.541 27.94,15.367 -1.2@31.496,15.367
Net-2_2: "LB1403 LEFT.2" -2.2 | length 6.5
  Top Layer w0.508: 20.574,10.541 20.574,11.303 -2.2@24.638,15.367
Net-3_2: "LB1403 LEFT.3" -3.2 | length 4.8
  Top Layer w0.508: 18.034,10.541 -3.2@18.034,15.367
Net-4_2: "LB1403 LEFT.4" -4.2 | length 7
  Bottom Layer w0.508: -4.2@11.176,15.367 11.176,14.199 11.938,13.437 12.598,13.437 15.494,10.541
Net-5_2: "LB1403 LEFT.6" -5.2 | length 8.6
  Bottom Layer w0.508: -5.2@3.81,15.367 5.588,15.367 10.414,10.541
pads on no net: 0_1.1 0_1.2 0_2.1 0_2.2 0_3.1 0_3.2 0_4.1 0_4.2 0_5.1 0_5.2 1_1.1 1_1.2 1_2.1 1_2.2 1_3.1 1_3.2 1_4.1 1_4.2 1_5.1 1_5.2 1k_1.1 1k_1.2 1k_2.1 1k_2.2 1k_3.1 1k_3.2 1k_4.1 1k_4.2 1k_5.1 1k_5.2 1U_left_1.1 1U_left_1.2 1U_left_2.1 1U_left_2.2 1U_left_3.1 1U_left_3.2 1U_left_4.1 1U_left_4.2 1U_left_5.1 1U_left_5.2 1U_right_1.1 1U_right_1.2 1U_right_2.1 1U_right_2.2 1U_right_3.1 1U_right_3.2 1U_right_4.1 1U_right_4.2 1U_right_5.1 1U_right_5.2 2.2K_left_1.1 2.2K_left_1.2 2.2K_left_2.1 2.2K_left_2.2 2.2K_left_3.1 2.2K_left_3.2 2.2K_left_4.1 2.2K_left_4.2 2.2K_left_5.1 2.2K_left_5.2 2.2K_right_1.1 2.2K_right_1.2 2.2K_right_2.1 2.2K_right_2.2 2.2K_right_3.1 2.2K_right_3.2 2.2K_right_4.1 2.2K_right_4.2 2.2K_right_5.1 2.2K_right_5.2 2_1.1 2_1.2 2_2.1 2_2.2 2_3.1 2_3.2 2_4.1 2_4.2 2_5.1 2_5.2 3_1.1 3_1.2 3_2.1 3_2.2 3_3.1 3_3.2 3_4.1 3_4.2 3_5.1 3_5.2 4.7U_left_1.1 4.7U_left_1.2 4.7U_left_2.1 4.7U_left_2.2 4.7U_left_3.1 4.7U_left_3.2 4.7U_left_4.1 4.7U_left_4.2 4.7U_left_5.1 4.7U_left_5.2 4.7U_right_1.1 4.7U_right_1.2 4.7U_right_2.1 4.7U_right_2.2 4.7U_right_3.1 4.7U_right_3.2 4.7U_right_4.1 4.7U_right_4.2 4.7U_right_5.1 4.7U_right_5.2 4_1.1 4_1.2 4_2.1 4_2.2 4_3.1 4_3.2 4_4.1 4_4.2 4_5.1 4_5.2 5_1.1 5_1.2 5_2.1 5_2.2 5_3.1 5_3.2 5_4.1 5_4.2 5_5.1 5_5.2 10K_left_1.1 10K_left_1.2 10K_left_2.1 10K_left_2.2 10K_left_3.1 10K_left_3.2 10K_left_4.1 10K_left_4.2 10K_left_5.1 10K_left_5.2 10K_right_1.1 10K_right_1.2 10K_right_2.1 10K_right_2.2 10K_right_3.1 10K_right_3.2 10K_right_4.1 10K_right_4.2 10K_right_5.1 10K_right_5.2 10U_right_1.1 10U_right_1.2 10U_right_2.1 10U_right_2.2 10U_right_3.1 10U_right_3.2 10U_right_4.1 10U_right_4.2 10U_right_5.1 10U_right_5.2 12V_1.1 12V_1.2 12V_2.1 12V_2.2 12V_3.1 12V_3.2 12V_4.1 12V_4.2 12V_5.1 12V_5.2 100_left_1.1 100_left_1.2 100_left_2.1 100_left_2.2 100_left_3.1 100_left_3.2 100_left_4.1 100_left_4.2 100_left_5.1 100_left_5.2 100_right_1.1 100_right_1.2 100_right_2.1 100_right_2.2 100_right_3.1 100_right_3.2 100_right_4.1 100_right_4.2 100_right_5.1 100_right_5.2 "10U _left_1.1" "10U _left_1.2" "10U _left_2.1" "10U _left_2.2" "10U _left_3.1" "10U _left_3.2" "10U _left_4.1" "10U _left_4.2" "10U _left_5.1" "10U _left_5.2" "50K PRESET _left_1.1" "50K PRESET _left_1.2" "50K PRESET _left_1.3" "50K PRESET _left_2.1" "50K PRESET _left_2.2" "50K PRESET _left_2.3" "50K PRESET _left_3.1" "50K PRESET _left_3.2" "50K PRESET _left_3.3" "50K PRESET _left_4.1" "50K PRESET _left_4.2" "50K PRESET _left_4.3" "50K PRESET _left_5.1" "50K PRESET _left_5.2" "50K PRESET _left_5.3" "50K PRESET_right_1.1" "50K PRESET_right_1.2" "50K PRESET_right_1.3" "50K PRESET_right_2.1" "50K PRESET_right_2.2" "50K PRESET_right_2.3" "50K PRESET_right_3.1" "50K PRESET_right_3.2" "50K PRESET_right_3.3" "50K PRESET_right_4.1" "50K PRESET_right_4.2" "50K PRESET_right_4.3" "50K PRESET_right_5.1" "50K PRESET_right_5.2" "50K PRESET_right_5.3" "LB1403 LEFT_1.1" "LB1403 LEFT_1.2" "LB1403 LEFT_1.3" "LB1403 LEFT_1.4" "LB1403 LEFT_1.5" "LB1403 LEFT_1.6" "LB1403 LEFT_1.7" "LB1403 LEFT_1.8" "LB1403 LEFT_1.9" "LB1403 LEFT_2.1" "LB1403 LEFT_2.2" "LB1403 LEFT_2.3" "LB1403 LEFT_2.4" "LB1403 LEFT_2.5" "LB1403 LEFT_2.6" "LB1403 LEFT_2.7" "LB1403 LEFT_2.8" "LB1403 LEFT_2.9" "LB1403 LEFT_3.1" "LB1403 LEFT_3.2" "LB1403 LEFT_3.3" "LB1403 LEFT_3.4" "LB1403 LEFT_3.5" "LB1403 LEFT_3.6" "LB1403 LEFT_3.7" "LB1403 LEFT_3.8" "LB1403 LEFT_3.9" "LB1403 LEFT_4.1" "LB1403 LEFT_4.2" "LB1403 LEFT_4.3" "LB1403 LEFT_4.4" "LB1403 LEFT_4.5" "LB1403 LEFT_4.6" "LB1403 LEFT_4.7" "LB1403 LEFT_4.8" "LB1403 LEFT_4.9" "LB1403 LEFT_5.1" "LB1403 LEFT_5.2" "LB1403 LEFT_5.3" "LB1403 LEFT_5.4" "LB1403 LEFT_5.5" "LB1403 LEFT_5.6" "LB1403 LEFT_5.7" "LB1403 LEFT_5.8" "LB1403 LEFT_5.9" "LB1403 RIGHT_1.1" "LB1403 RIGHT_1.2" "LB1403 RIGHT_1.3" "LB1403 RIGHT_1.4" "LB1403 RIGHT_1.5" "LB1403 RIGHT_1.6" "LB1403 RIGHT_1.7" "LB1403 RIGHT_1.8" "LB1403 RIGHT_1.9" "LB1403 RIGHT_2.1" "LB1403 RIGHT_2.2" "LB1403 RIGHT_2.3" "LB1403 RIGHT_2.4" "LB1403 RIGHT_2.5" "LB1403 RIGHT_2.6" "LB1403 RIGHT_2.7" "LB1403 RIGHT_2.8" "LB1403 RIGHT_2.9" "LB1403 RIGHT_3.1" "LB1403 RIGHT_3.2" "LB1403 RIGHT_3.3" "LB1403 RIGHT_3.4" "LB1403 RIGHT_3.5" "LB1403 RIGHT_3.6" "LB1403 RIGHT_3.7" "LB1403 RIGHT_3.8" "LB1403 RIGHT_3.9" "LB1403 RIGHT_4.1" "LB1403 RIGHT_4.2" "LB1403 RIGHT_4.3" "LB1403 RIGHT_4.4" "LB1403 RIGHT_4.5" "LB1403 RIGHT_4.6" "LB1403 RIGHT_4.7" "LB1403 RIGHT_4.8" "LB1403 RIGHT_4.9" "LB1403 RIGHT_5.1" "LB1403 RIGHT_5.2" "LB1403 RIGHT_5.3" "LB1403 RIGHT_5.4" "LB1403 RIGHT_5.5" "LB1403 RIGHT_5.6" "LB1403 RIGHT_5.7" "LB1403 RIGHT_5.8" "LB1403 RIGHT_5.9" -1_1.1 -1_1.2 -1_2.1 -1_2.2 -1_3.1 -1_3.2 -1_4.1 -1_4.2 -1_5.1 -1_5.2 -2_1.1 -2_1.2 -2_2.1 -2_2.2 -2_3.1 -2_3.2 -2_4.1 -2_4.2 -2_5.1 -2_5.2 -3_1.1 -3_1.2 -3_2.1 -3_2.2 -3_3.1 -3_3.2 -3_4.1 -3_4.2 -3_5.1 -3_5.2 -4_1.1 -4_1.2 -4_2.1 -4_2.2 -4_3.1 -4_3.2 -4_4.1 -4_4.2 -4_5.1 -4_5.2 -5_1.1 -5_1.2 -5_2.1 -5_2.2 -5_3.1 -5_3.2 -5_4.1 -5_4.2 -5_5.1 -5_5.2 AUDIO_1.1 AUDIO_1.2 AUDIO_1.3 AUDIO_2.1 AUDIO_2.2 AUDIO_2.3 AUDIO_3.1 AUDIO_3.2 AUDIO_3.3 AUDIO_4.1 AUDIO_4.2 AUDIO_4.3 AUDIO_5.1 AUDIO_5.2 AUDIO_5.3 C1_1.1 C1_1.2 C2_1.1 C2_1.2 LED1_1.1 LED1_1.2 LED2_1.1 LED2_1.2 P1_1.1 P1_1.2 Q1_1.1 Q1_1.2 Q1_1.3 Q2_1.1 Q2_1.2 Q2_1.3 R1_1.1 R1_1.2 R2_1.1 R2_1.2